# EAGLE board powerBoard (EAGLE 9.4.2)
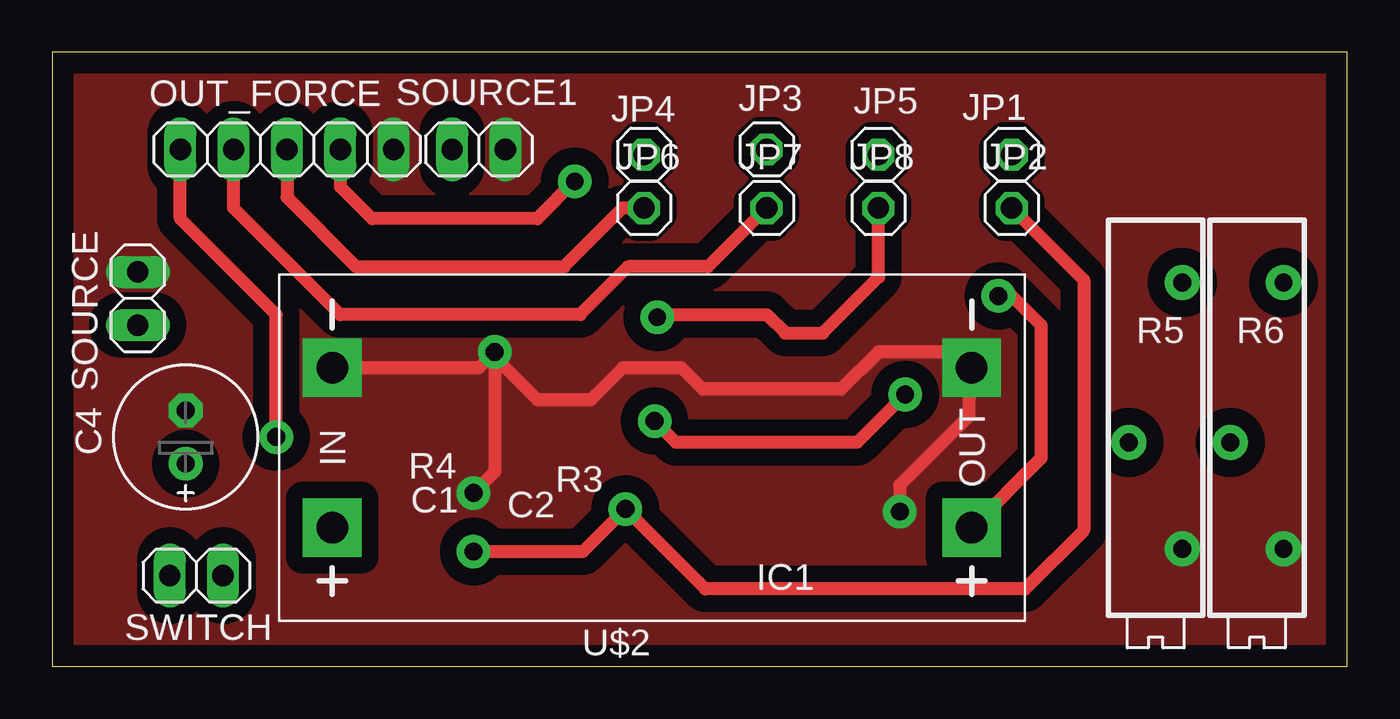
[diagram p0: board, top side]
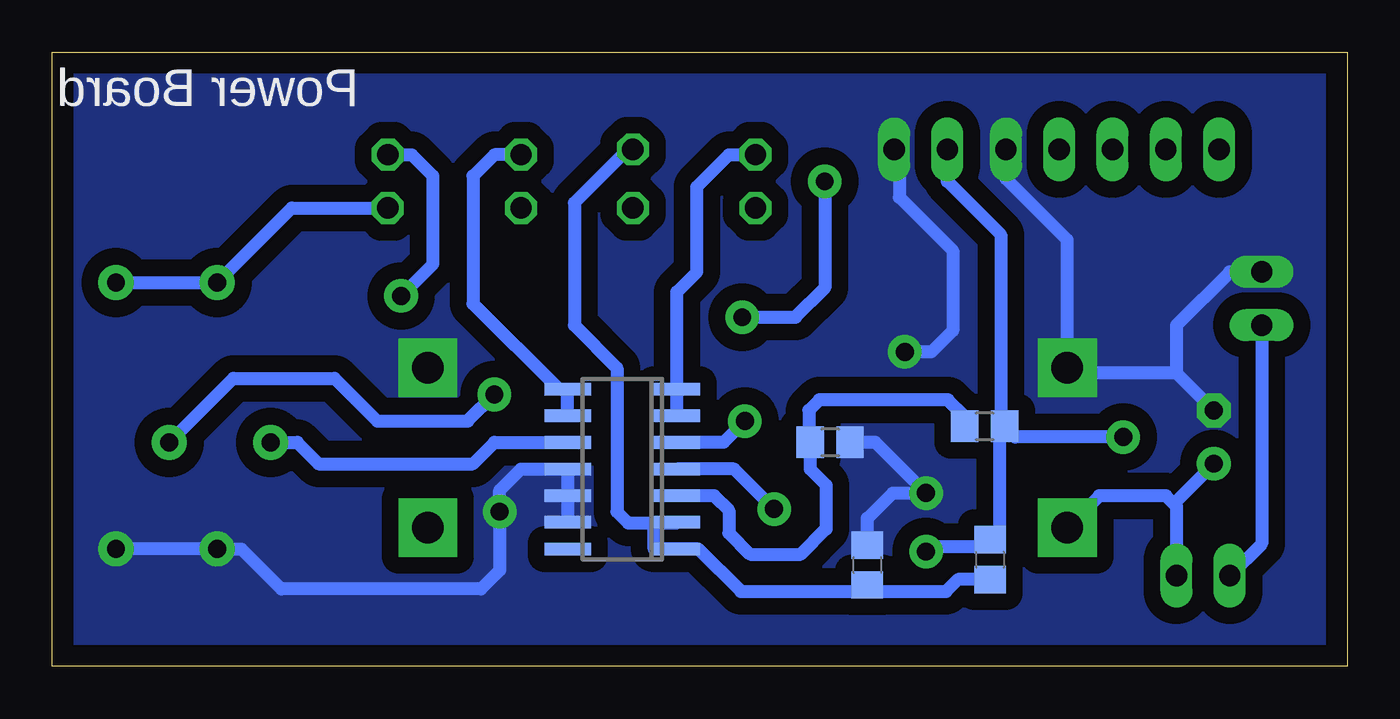
[diagram p1: board, bottom side, seen from below]

Size 61.7 x 29.26 mm. Coordinates in mm from the lower left corner, seen from the top.
Outline: 0,0 61.7,0 61.7,29.26 0,29.26 0,0
Copper layers (1*16): Top 0.035mm / dielectric 1.5mm / Bottom 0.035mm
Design rules "default": minimum track width 6mil, minimum drill 0.35mm, track to track 6mil, track to pad 6mil, pad to pad 6mil, via to via 6mil, smd to smd 6mil, copper to edge 40mil, drill to drill 6mil, minimum pad ring 10mil, minimum via ring 8mil, stop-mask expansion 4mil, vias tented up to drill 0mil, thermal gap 10mil

## Footprints (pad centres in the part's own frame; a part is rotated, then mirrored left to right if it is on the bottom)
C0805 = smd 1.3 x 1.5: 1 -0.95,0; 2 0.95,0
E2,5-7 = drill 0.85 pad 1.6: + -1.27,0 | drill 0.85 pad 1.6 octagon: - 1.27,0
SO14 = smd 0.6 x 2.2: 1 -3.81,-2.6; 2 -2.54,-2.6; 3 -1.27,-2.6; 4 0,-2.6; 5 1.27,-2.6; 6 2.54,-2.6; 7 3.81,-2.6; 8 3.81,2.6; 9 2.54,2.6; 10 1.27,2.6; 11 0,2.6; 12 -1.27,2.6; 13 -2.54,2.6; 14 -3.81,2.6
1X01 = drill 1.016 octagon: 1 0,0
1X05 = drill 1.016 long: 1 -5.08,0; 2 -2.54,0; 3 0,0; 4 2.54,0; 5 5.08,0
R0805 = smd 1.3 x 1.5: 1 -0.95,0; 2 0.95,0
RTRIM3006P = drill 0.85 pad 1.676: 1 -7.62,1.27; 2 0,-1.27; 3 5.08,1.27
1X02 = drill 1.016 long: 1 -1.27,0; 2 1.27,0
DC-DC-STEP-UP-MT3608 = drill 1.5 pad 2.8 square: IN+ 15.24,3.81; IN- 15.24,-3.81; OUT+ -15.24,3.81; OUT- -15.24,-3.81

## Placement (x,y rotation side)
C1  47uF  [C0805]  17.02,5.08 270 bottom
C2  47uF  [C0805]  22.86,4.83 90 bottom
C4  [E2,5-7]  6.35,10.92 90 top
IC1  LMV324M  [SO14]  34.54,9.4 90 bottom
JP1  [1X01]  45.72,24.38 0 top
JP2  [1X01]  45.72,21.84 0 top
JP3  [1X01]  34.04,24.64 0 top
JP4  [1X01]  28.19,24.38 0 top
JP5  [1X01]  39.37,24.38 0 top
JP6  [1X01]  28.19,21.84 0 top
JP7  [1X01]  34.04,21.84 0 top
JP8  [1X01]  39.37,21.84 0 top
OUT_FORCE  [1X05]  11.18,24.64 0 top
R3  10k  [R0805]  24.64,10.67 180 bottom
R4  10k  [R0805]  17.27,11.43 180 bottom
R5  100k  [RTRIM3006P]  52.58,10.67 270 top
R6  100k  [RTRIM3006P]  57.4,10.67 270 top
SOURCE  [1X02]  4.06,17.53 270 top
SOURCE1  [1X02]  20.32,24.64 0 top
SWITCH  [1X02]  6.86,4.32 0 top
U$2  DC-DC-STEP-UP-MT3608  [DC-DC-STEP-UP-MT3608]  28.57,10.41 180 top

## Library data of the parts
C1 C2 = rcl; SPICEPREFIX: C
C4 = rcl3; SPICEPREFIX: C
IC1 = linear
JP1-JP8 OUT_FORCE SOURCE SOURCE1 SWITCH = pinhead
R3 R4 = rcl; SPICEPREFIX: R
R5 R6 = rcl2; SPICEMODEL: X; SPICEPREFIXL: POT
U$2 = diy-modules_me2

## Nets
GND: C2.2 C4.- IC1.11 IC1.12 IC1.13 OUT_FORCE.5 R3.1 R5.3 R6.3 SOURCE1.2 SOURCE.1 U$2.IN- U$2.OUT-
N$1: JP1.1 U$2.OUT+
N$2: IC1.3 R3.2 R4.2
N$3: SOURCE.2 SWITCH.1
N$4: C4.+ SWITCH.2 U$2.IN+
N$5: IC1.10 R5.2
N$6: IC1.5 R6.2
N$7: JP8.1 OUT_FORCE.4
N$8: JP6.1 OUT_FORCE.3
N$9: JP7.1 OUT_FORCE.2
VG: C1.2 C2.1 IC1.1 IC1.2 JP3.1
VG-1: IC1.8 IC1.9 JP5.1
VG/2: IC1.6 IC1.7 JP4.1
VHIGH: C1.1 IC1.4 JP2.1 OUT_FORCE.1 R4.1 R5.1 R6.1 SOURCE1.1

## Tracks (layer width: path | path; a pad name or v marks a point on that pad's centre or on a via)
GND  (via drill 0.85 pad 1.6)
  Top 0.61: v21.08,14.99 21.08,9.27 v20.07,8.26 | v40.39,7.37 40.39,8.64 43.69,11.94 43.69,14.1 U$2.OUT- 43.05,14.99 39.37,14.99 37.59,13.21 30.99,13.21 29.97,14.22 27.18,14.22 25.65,12.7 23.11,12.7 21.08,14.73 v21.08,14.99 | v21.08,14.99 20.32,14.22 U$2.IN-
  Bottom 0.61: IC1.13 IC1.12 IC1.11 39.37,9.4 40.39,8.38 v40.39,7.37 40.39,4.57 41.28,3.68 50.8,3.68 52.71,5.59 R5.3 R6.3 | SOURCE1.2 21.34,24.38 21.34,22.35 18.8,19.81 18.8,16 19.81,14.99 v21.08,14.99 | OUT_FORCE.5 16.26,23.24 13.33,20.32 U$2.IN- 13.08,13.97 8.13,13.97 | SOURCE.1 5.59,18.8 8.13,16.26 8.13,13.97 | 8.13,13.97 C4.- | R3.1 22.48,10.67 v20.07,8.26 21.65,8.26 22.86,7.05 C2.2
  pour Top (isolate 0.8, no thermals): 0,29.21 0,0 61.72,0 61.72,29.21
  pour Bottom (isolate 0.8, no thermals): 0,29.21 0,0 61.72,0 61.72,29.21
N$1  (via drill 0.85 pad 1.6)
  Top 0.61: v45.09,17.65 45.72,17.65 47.12,16.26 47.12,9.91 U$2.OUT+
  Bottom 0.61: v45.09,17.65 43.56,19.18 43.56,23.37 44.58,24.38 JP1.1
N$2
  Bottom 0.61: IC1.3 30.17,8.13 29.46,7.43 29.46,6.35 28.45,5.33 26.04,5.33 24.83,6.54 24.83,8.64 25.59,9.4 R3.2 25.53,10.73 25.65,10.86 25.65,12.19 25.15,12.7 19.02,12.7 18.22,11.9 R4.2
N$3
  Bottom 0.61: SOURCE.2 4.06,5.84 SWITCH.1
N$4
  Bottom 0.61: U$2.IN+ 11.81,8.13 8.64,8.13 8.26,7.75 | C4.+ 8.26,7.75 | 8.26,7.75 8.13,7.62 SWITCH.2
N$5
  Bottom 0.61: R5.2 50.04,10.67 49.02,9.65 41.66,9.65 40.64,10.67 IC1.10
N$6  (via drill 0.85 pad 1.6)
  Top 0.61: v40.64,12.95 38.35,10.67 29.72,10.67 v28.7,11.68
  Bottom 0.61: v40.64,12.95 41.91,11.68 46.23,11.68 48.26,13.72 53.09,13.72 R6.2 | IC1.5 29.72,10.67 v28.7,11.68
N$7  (via drill 0.85 pad 1.6)
  Top 0.61: OUT_FORCE.4 13.72,22.86 15.24,21.34 23.11,21.34 v24.89,23.11 | v28.83,16.64 28.83,16.76 34.04,16.76 34.93,15.88 36.7,15.88 39.37,18.54 JP8.1
  Bottom 0.61: v24.89,23.11 24.89,18.03 26.29,16.64 v28.83,16.64
N$8
  Top 0.61: OUT_FORCE.3 11.18,22.35 14.48,19.05 24.38,19.05 27.18,21.84 JP6.1
N$9
  Top 0.61: JP7.1 31.24,19.05 27.43,19.05 25.15,16.76 13.72,16.76 8.64,21.84 OUT_FORCE.2
VG
  Bottom 0.61: 32.99,6.83 33.02,6.8 33.02,5.59 IC1.1 30.93,5.59 28.9,3.56 23.18,3.56 C2.1 22.54,3.56 19.12,3.56 18.54,4.13 C1.2 | IC1.2 31.97,6.83 32.99,6.83 | JP3.1 34.29,24.64 36.83,22.1 36.83,16.26 34.8,14.22 34.8,7.37 34.26,6.83 32.99,6.83
VG-1
  Bottom 0.61: IC1.9 IC1.8 37.59,13.21 41.66,17.27 41.66,23.37 40.64,24.38 JP5.1
VG/2
  Bottom 0.61: IC1.6 IC1.7 31.94,17.84 30.99,18.8 30.99,22.86 29.46,24.38 JP4.1
VHIGH  (via drill 0.85 pad 1.6)
  Top 0.61: v20.07,5.46 25.27,5.46 v27.3,7.49 31.11,3.68 46.36,3.68 49.15,6.48 49.15,18.41 JP2.1 | v10.67,10.92 10.67,16.76 6.1,21.34 OUT_FORCE.1
  Bottom 0.61: v20.07,5.46 19.81,5.71 17.33,5.71 C1.1 16.58,6.47 16.58,11.18 R4.1 | v27.3,7.49 29.21,9.4 IC1.4 | SOURCE1.1 19.05,23.11 16.51,20.57 16.51,11.5 16.44,11.43 R4.1 | JP2.1 50.29,21.84 R5.1 R6.1 | R4.1 15.81,10.92 v10.67,10.92

## Text on the board
bPlace: Power Board